# Altium PCB PowerBoard.PcbDoc
Units mil, origin at the board's own origin, x right, y up, seen from the top; angles counter-clockwise.
Board outline 6000 x 6000 mil, 2 copper layers (Top Layer, Bottom Layer); 101 components, 70 nets, 286 pads, 8 vias.
Unrouted connection lines stored in the file: 1.
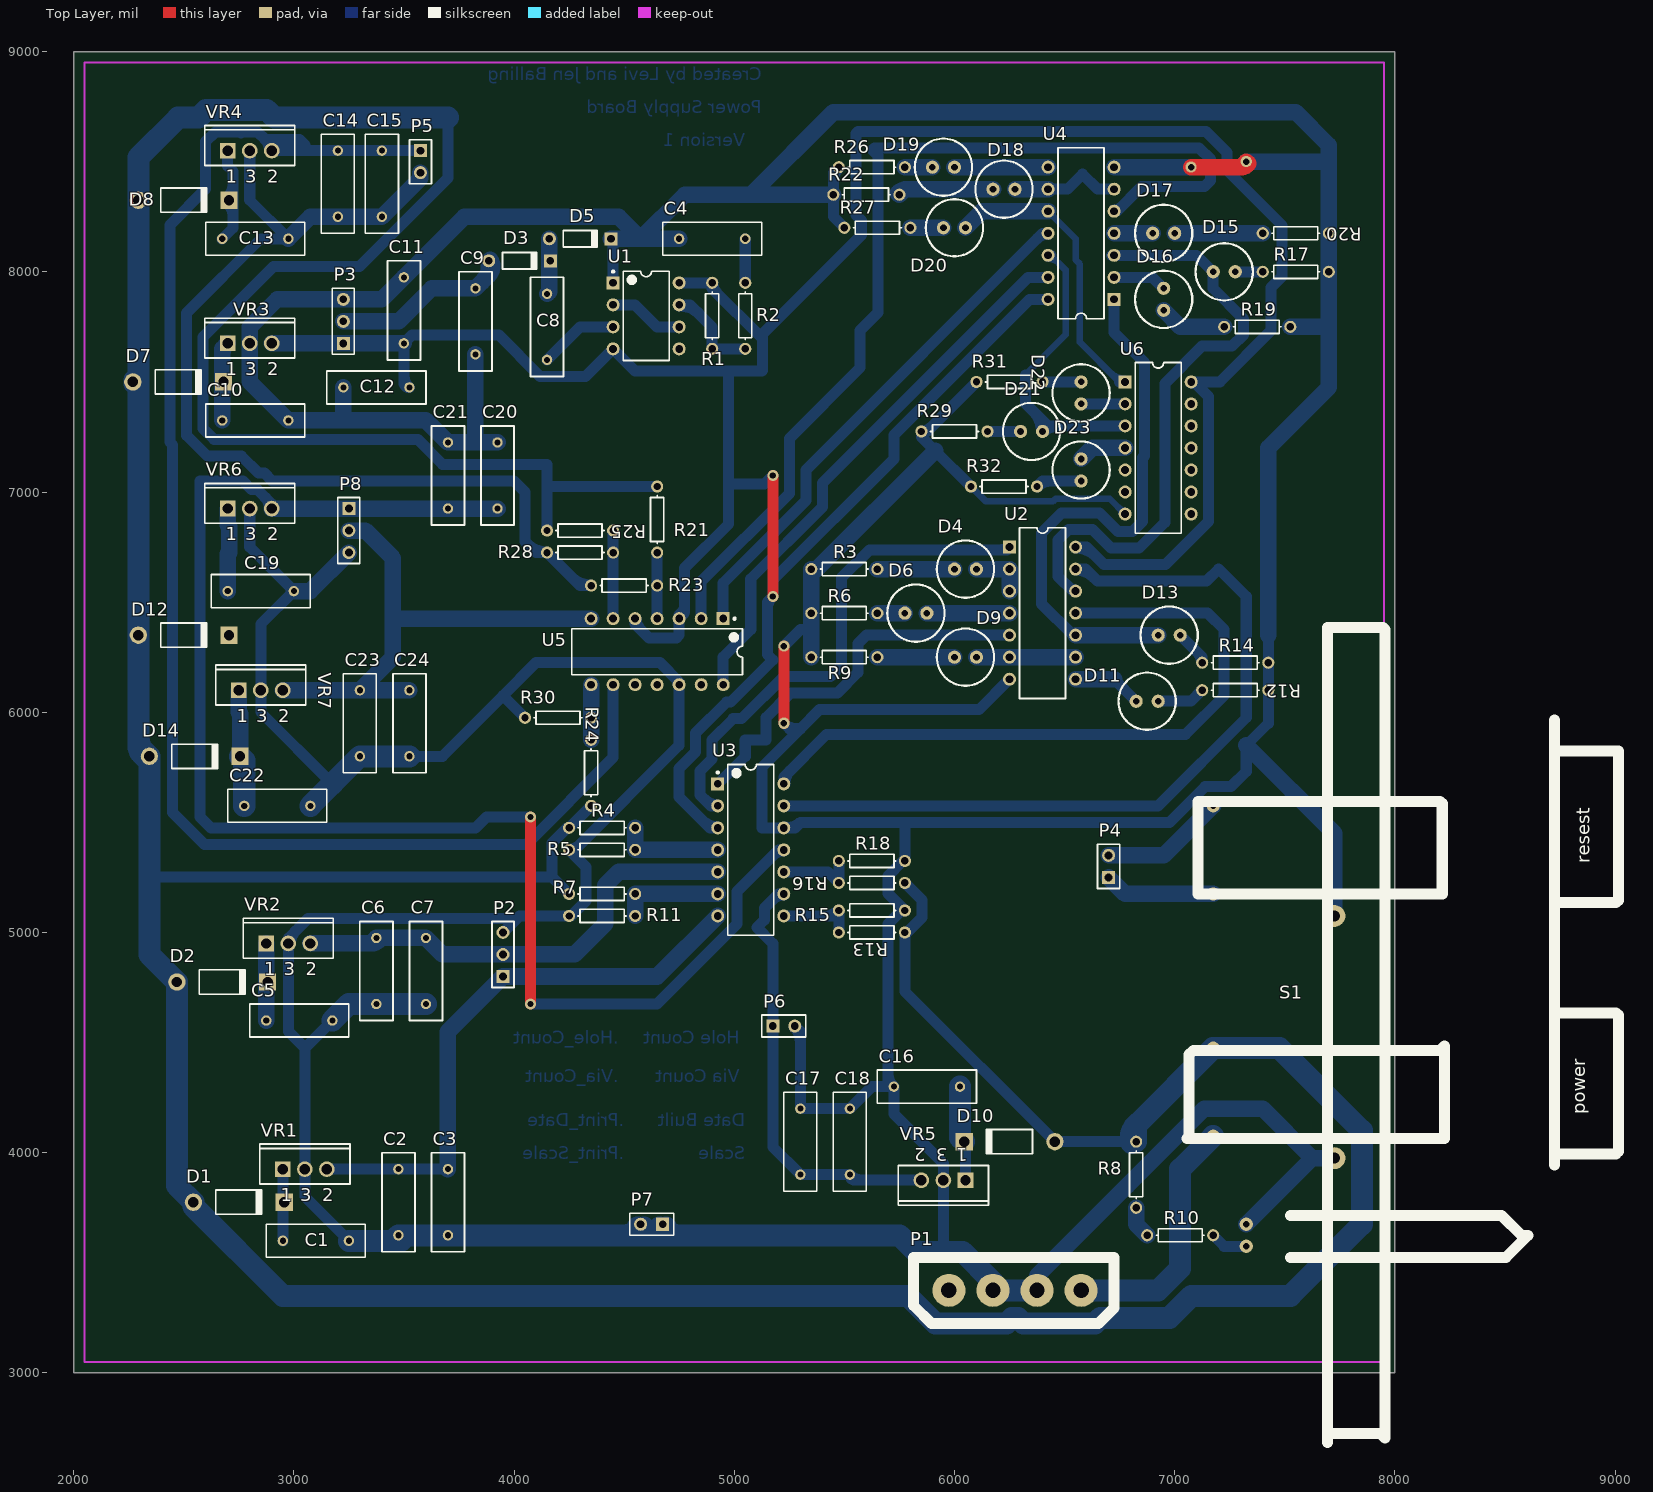
[diagram p0: Top Layer view]
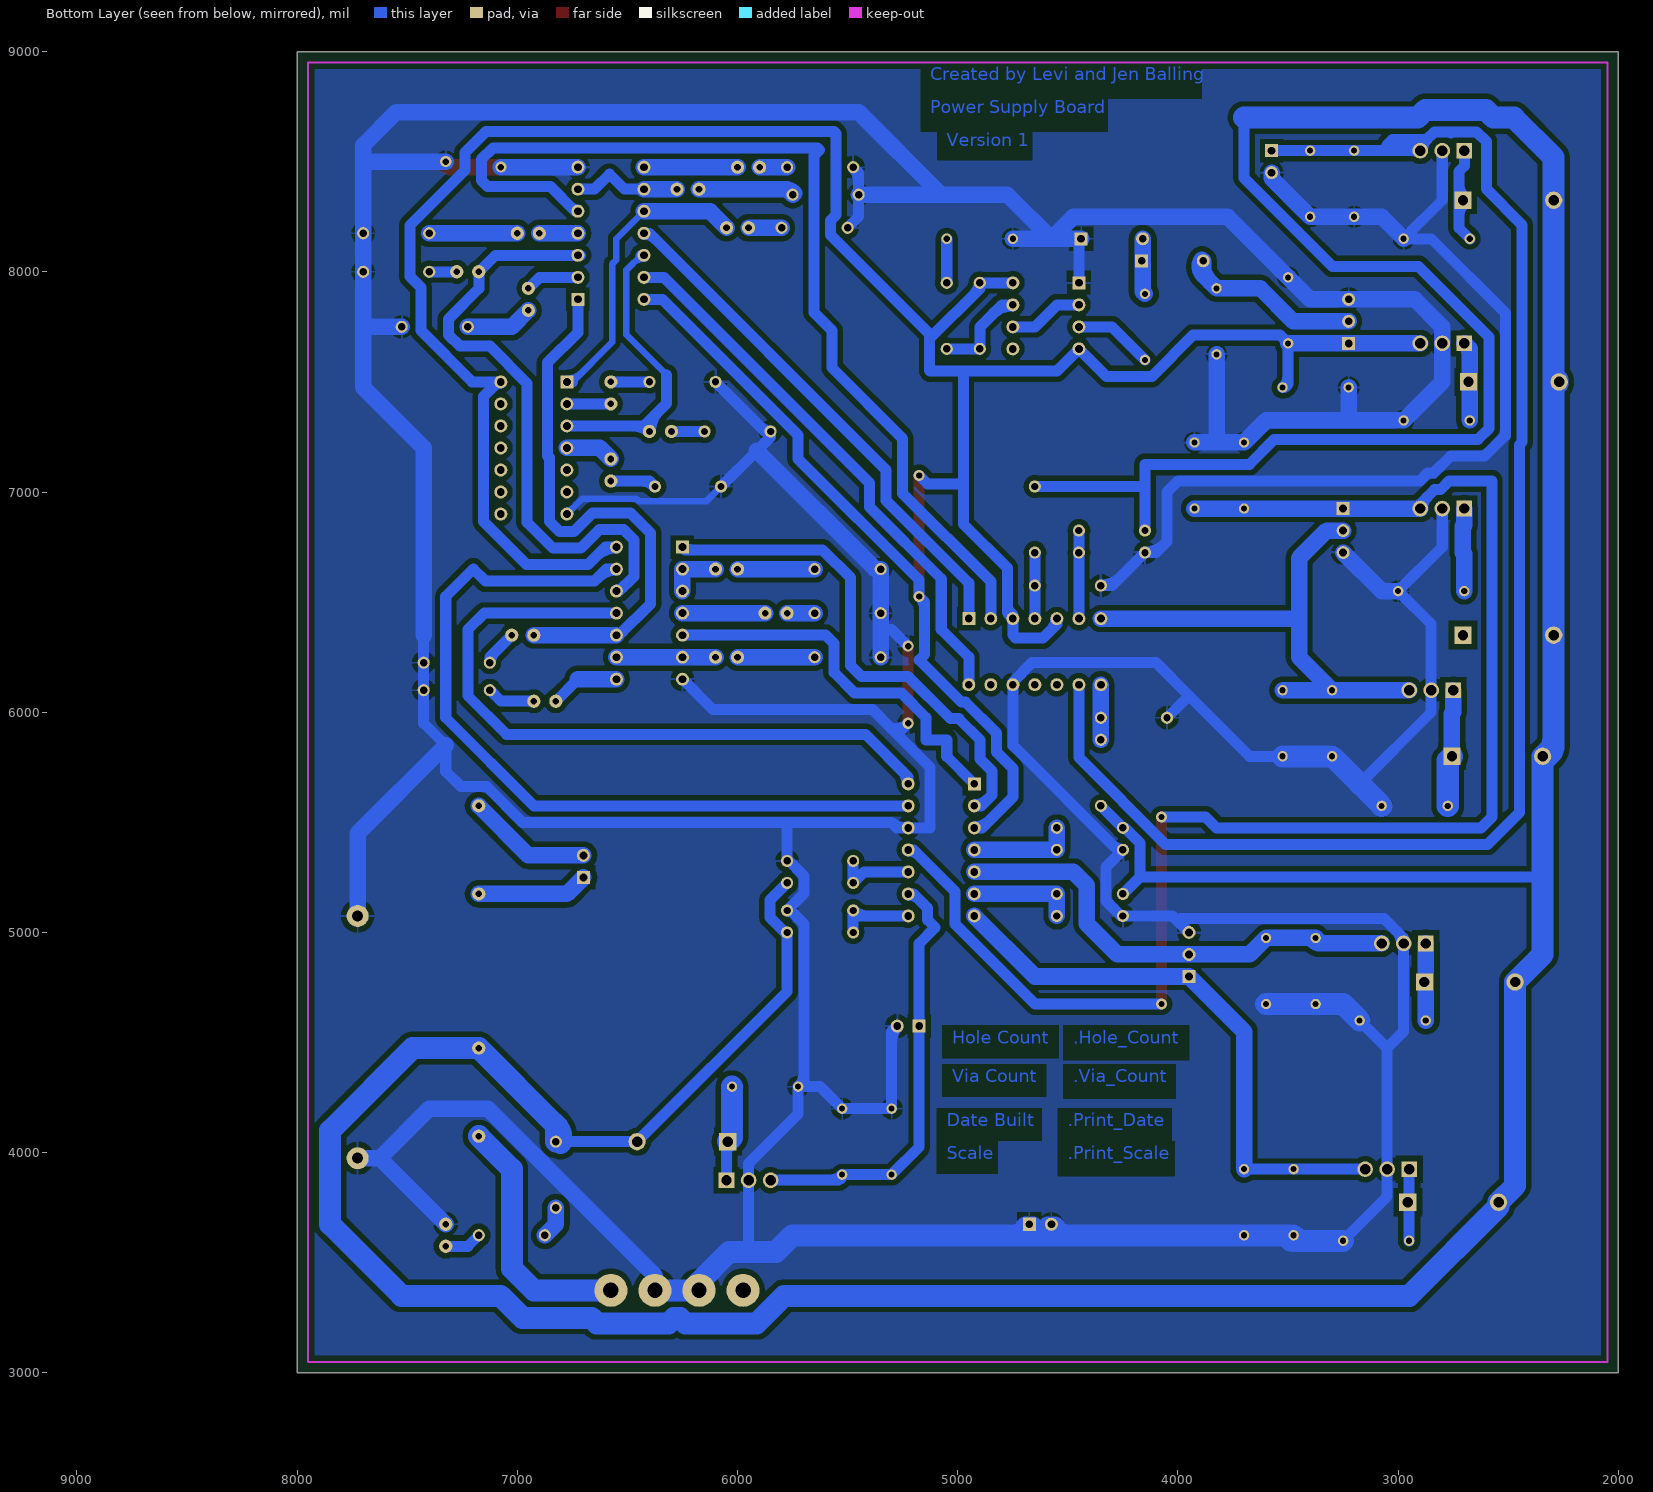
[diagram p1: Bottom Layer view, seen from below]

## Layer stack, top to bottom
Top Layer: signal copper 1.4
Dielectric: dielectric 12.6, FR-4, Dk 4.8
Bottom Layer: signal copper 1.4

## Board outline
2000,3000 8000,3000 8000,9000 2000,9000

## Design rules (kind name [scope] priority, off if disabled: settings)
Clearance [All] p1: gap=25
PolygonConnect [All] p1: connectstyle=Relief reliefconductorwidth=10 reliefentries=4 polygonreliefangle="90 Angle"
RoomDefinition PowerAndFanBoard [InComponentClass('PowerAndFanBoard')] p1: confinementstyle=ConfineIn formatcopy=TRUE lockcomponents=FALSE outline 2050,3050 7950,3050 7950,8950 2050,8950
RoutingVias [All] p1: holewidth=32 width=62 viastyle="Through Hole" minholewidth=28 minwidth=50 maxholewidth=28 maxwidth=50
SilkscreenOverComponentPads [All] p1: minsilkscreentomaskgap=10
SolderMaskExpansion [All] p1: expansion=4
Width [All] p1: maxlimit=100 minlimit=25 preferedwidth=50 minimp=50.000000 maximp=50.000000 favimp=50.000000
27 further rules are at their usual default settings.

## Components (designator, comment, footprint, x,y, rotation, side; value= is the part's Value field where it differs from the comment)
C1 "Cap" RAD-0.3 3100,3600 r180 top
C2 "Cap" RAD-0.3 3475,3775 r90 top
C3 "Cap" RAD-0.3 3700,3775 r90 top
C4 "Cap" RAD-0.3 4900,8150 r180 top
C5 "Cap" RAD-0.3 3025,4600 r180 top
C6 "Cap" RAD-0.3 3375,4825 r90 top
C7 "Cap" RAD-0.3 3600,4825 r90 top
C8 "Cap" RAD-0.3 4150,7750 r90 top
C9 "Cap" RAD-0.3 3825,7775 r270 top
C10 "Cap" RAD-0.3 2825,7325 r180 top
C11 "Cap" RAD-0.3 3500,7825 r270 top
C12 "Cap" RAD-0.3 3375,7475 r0 top
C13 "Cap" RAD-0.3 2825,8150 r180 top
C14 "Cap" RAD-0.3 3200,8400 r90 top
C15 "Cap" RAD-0.3 3400,8400 r90 top
C16 "Cap" RAD-0.3 5875,4300 r0 top
C17 "Cap" RAD-0.3 5300,4050 r270 top
C18 "Cap" RAD-0.3 5525,4050 r270 top
C19 "Cap" RAD-0.3 2850,6550 r180 top
C20 "Cap" RAD-0.3 3925,7075 r270 top
C21 "Cap" RAD-0.3 3700,7075 r270 top
C22 "Cap" RAD-0.3 2925,5575 r180 top
C23 "Cap" RAD-0.3 3300,5950 r90 top
C24 "Cap" RAD-0.3 3525,5950 r90 top
D1 "Diode 1N4001" DO-41 2750,3775 r0 top
D2 "Diode 1N4001" DO-41 2675,4775 r0 top
D3 "Diode 1N4148" DO-35 4025,8050 r0 top
D4 "RED_LED" LED 6100,6650 r180 top
D5 "Diode 1N4148" DO-35 4300,8150 r0 top
D6 "GREEN_LED" LED 5875,6450 r180 top
D7 "Diode 1N4001" DO-41 2475,7500 r0 top
D8 "Diode 1N4001" DO-41 2500,8325 r0 top
D9 "RED_LED" LED 6100,6250 r180 top
D10 "Diode 1N4001" DO-41 6250,4050 r180 top
D11 "GREEN_LED" LED 6825,6050 r0 top
D12 "Diode 1N4001" DO-41 2500,6350 r0 top
D13 "RED_LED" LED 6925,6350 r0 top
D14 "Diode 1N4001" DO-41 2550,5800 r0 top
D15 "RED_LED" LED 7175,8000 r0 top
D16 "GREEN_LED" LED 6950,7925 r270 top
D17 "GREEN_LED" LED 6900,8175 r0 top
D18 "RED_LED" LED 6275,8375 r180 top
D19 "GREEN_LED" LED 6000,8475 r180 top
D20 "RED_LED" LED 6050,8200 r180 top
D21 "RED_LED" LED 6400,7275 r180 top
D22 "GREEN_LED" LED 6575,7400 r90 top
D23 "GREEN_LED" LED 6575,7150 r270 top
P1 "Header 4" MainPowerConnector 5975,3375 r0 top
P2 "Header 3" HDR1X3 3950,4800 r90 top
P3 "Header 3" HDR1X3 3225,7675 r90 top
P4 "Header 2" HDR1X2 6700,5250 r90 top
P5 "Header 2" HDR1X2 3575,8550 r270 top
P6 "Header 2" HDR1X2 5175,4575 r0 top
P7 "Header 2" HDR1X2 4675,3675 r180 top
P8 "Header 3" HDR1X3 3250,6925 r270 top
R1 "Res1" AXIAL-0.3 4900,7800 r270 top
R2 "Res1" AXIAL-0.3 5050,7800 r90 top
R3 "Res1" AXIAL-0.3 5500,6650 r180 top
R4 "Res1" AXIAL-0.3 4400,5475 r0 top
R5 "Res1" AXIAL-0.3 4400,5375 r180 top
R6 "Res1" AXIAL-0.3 5500,6450 r180 top
R7 "Res1" AXIAL-0.3 4400,5175 r0 top
R8 "Res1" AXIAL-0.3 6825,3900 r270 top
R9 "Res1" AXIAL-0.3 5500,6250 r180 top
R10 "Res1" AXIAL-0.3 7025,3625 r0 top
R11 "Res1" AXIAL-0.3 4400,5075 r180 top
R12 "Res1" AXIAL-0.3 7275,6100 r0 top
R13 "Res1" AXIAL-0.3 5625,5000 r180 top
R14 "Res1" AXIAL-0.3 7275,6225 r0 top
R15 "Res1" AXIAL-0.3 5625,5100 r0 top
R16 "Res1" AXIAL-0.3 5625,5225 r180 top
R17 "Res1" AXIAL-0.3 7550,8000 r0 top
R18 "Res1" AXIAL-0.3 5625,5325 r0 top
R19 "Res1" AXIAL-0.3 7375,7750 r0 top
R20 "Res1" AXIAL-0.3 7550,8175 r0 top
R21 "Res1" AXIAL-0.3 4650,6875 r270 top
R22 "Res1" AXIAL-0.3 5600,8350 r180 top
R23 "Res1" AXIAL-0.3 4500,6575 r180 top
R24 "Res1" AXIAL-0.3 4350,5725 r90 top
R25 "Res1" AXIAL-0.3 4300,6825 r0 top
R26 "Res1" AXIAL-0.3 5625,8475 r180 top
R27 "Res1" AXIAL-0.3 5650,8200 r180 top
R28 "Res1" AXIAL-0.3 4300,6725 r180 top
R29 "Res1" AXIAL-0.3 6000,7275 r180 top
R30 "Res1" AXIAL-0.3 4200,5975 r180 top
R31 "Res1" AXIAL-0.3 6250,7500 r180 top
R32 "Res1" AXIAL-0.3 6225,7025 r180 top
S1 "nintendo_power_reset" PCBComponent_1 7175,4075 r90 top
U1 "LM555CN" N08E 4600,7800 r0 top
U2 "SN7416N" N014 6400,6450 r270 top
U3 "LM339N" N14A 5075,5375 r0 top
U4 "SN7416N" N014 6575,8175 r90 top
U5 "LM339N" N14A 4650,6275 r270 top
U6 "SN7416N" N014 6925,7200 r270 top
VR1 "L7812CP" ISOWATT220AB 3050,3925 r0 top
VR2 "L7805CP" ISOWATT220AB 2975,4950 r0 top
VR3 "L7805CP" ISOWATT220AB 2800,7675 r0 top
VR4 "L7812CP" ISOWATT220AB 2800,8550 r0 top
VR5 "L7805CP" ISOWATT220AB 5950,3875 r180 top
VR6 "L7812CP" ISOWATT220AB 2800,6925 r0 top
VR7 "L7805CP" ISOWATT220AB 2850,6100 r0 top

## Footprints (in the part's own frame and the unit in brackets; to place one, negate y for a bottom-side part, rotate by r counter-clockwise, add the part's x,y. Pads: shape width x height; smd on the part's side, far side on the other; paste and mask are expansions set on the pad)
AXIAL-0.3 [mm] "Axial Device, Thru-Hole; 2 Leads; 0.3 in Pin Spacing"
  round 1.4 hole 0.85: 1(-3.81,0) 2(3.81,0)
  silkscreen extent -2.77,-0.76 2.77,0.76
DO-35 [mm] "Diode, Axial; Body 3.8 x 1.9 mm (LxDia. max), Lead Dia. 0.53 mm (max)"
  round 1.5 hole 0.9: 1(-3.55,0)
  rect 1.5x1.5 hole 0.9: 2(3.55,0)
  silkscreen extent -1.95,-0.95 2.05,0.95
DO-41 [mm] "Diode, Axial; Body 5.2 x 2.7 mm (LxDia. max), Lead Dia. 0.86 mm (max)"
  round 2 hole 1.2: 1(-5.23,0)
  rect 2x2 hole 1.2: 2(5.23,0)
  silkscreen extent -2.65,-1.4 2.75,1.4
HDR1X2 [mm] "Connector; Header; 2 Position"
  rect 1.5x1.5 hole 0.9: 1(0,0)
  round 1.5 hole 0.9: 2(2.54,0)
  silkscreen extent -1.27,-1.27 3.81,1.27
HDR1X3 [mm] "Connector; Header; 3 Position"
  rect 1.5x1.5 hole 0.9: 1(0,0)
  round 1.5 hole 0.9: 2(2.54,0) 3(5.08,0)
  silkscreen extent -1.27,-1.27 6.35,1.27
ISOWATT220AB [mm] "TO, Thru-Hole, Vertical, Heatsink Mounted; 3 In-Line Leads; Pitch 2.54 mm; Pin sequence 1, 3, 2"
  rect 1.8x1.8 hole 1.2: 1(-2.54,0)
  round 1.8 hole 1.2: 2(2.54,0) 3(0,0)
  silkscreen extent -5.2,-1.7 5.2,2.9
LED [mil] "standard 5mm LED"
  round 60 hole 30: 1(0,0) 2(100,0)
  silkscreen extent -80,-130 180,130
MainPowerConnector [mil]
  round 150 hole 70: 1(0,0) 2(200,0) 3(400,0) 4(600,0)
  silkscreen extent -160,-150 750,150
N08E [mm] "DIP, 8-Leads, Row Spacing 7.62mm, Pitch 2.54mm, Body 9.91x6.35mm"
  rect 1.5x1.5 hole 0.9: 1(-3.81,3.81)
  round 1.5 hole 0.9: 2(-3.81,1.27) 3(-3.81,-1.27) 4(-3.81,-3.81) 5(3.81,-3.81) 6(3.81,-1.27) 7(3.81,1.27) 8(3.81,3.81)
  silkscreen extent -3.93,-5.15 2.65,5.23, body extent -3.6,-5.15 3.6,5.15, height 5.34
N014 [mm] "DIP; 14 Leads; Row Spacing 7.62 mm; Pitch 2.54 mm"
  rect 1.5x1.5 hole 0.9: 1(-7.62,-3.81)
  round 1.5 hole 0.9: 2(-5.08,-3.81) 3(-2.54,-3.81) 4(0,-3.81) 5(2.54,-3.81) 6(5.08,-3.81) 7(7.62,-3.81) 8(7.62,3.81) 9(5.08,3.81) 10(2.54,3.81) 11(0,3.81) 12(-2.54,3.81) 13(-5.08,3.81) 14(-7.62,3.81)
  silkscreen extent -9.85,-2.65 9.85,2.65
N14A [mm] "DIP, 14-Leads, Row Spacing 7.62mm, Pitch 2.54mm, Body 19.56x6.35mm"
  rect 1.5x1.5 hole 0.9: 1(-3.81,7.62)
  round 1.5 hole 0.9: 2(-3.81,5.08) 3(-3.81,2.54) 4(-3.81,0) 5(-3.81,-2.54) 6(-3.81,-5.08) 7(-3.81,-7.62) 8(3.81,-7.62) 9(3.81,-5.08) 10(3.81,-2.54) 11(3.81,0) 12(3.81,2.54) 13(3.81,5.08) 14(3.81,7.62)
  silkscreen extent -3.93,-9.85 2.65,9.85, body extent -3.55,-9.85 3.55,9.85, height 5.08
PCBComponent_1 [mil]
  round 60 hole 30: 1(0,0) 2(400,0) 3(1100,0) 4(1500,0) 5(-500,-150) 6(-400,-150)
  round 100 hole 50: 7(-100,-550) 8(1000,-550)
  silkscreen extent -1390,-1840 2310,120
RAD-0.3 [mm] "Radial Cap, Thru-Hole; 2 Leads; 0.3 in Pin Spacing"
  round 1.2 hole 0.7: 1(-3.81,0) 2(3.81,0)
  silkscreen extent -5.71,-1.91 5.71,1.91

## Part data
C1 C2 C3 C4 C5 C6 C7 C8 C9 C10 C11 C12 C13 C14 C15 C16 C17 C18 C19 C20 C21 C22 C23 C24: "Capacitor"
D1 D2 D7 D8 D10 D12 D14: "1 Amp General Purpose Rectifier"
D3 D5: "High Conductance Fast Diode"
D4 D6 D9 D11 D13 D15 D16 D17 D18 D19 D20 D21 D22 D23: library part LED0, "Typical INFRARED GaAs LED"
P1: "Header, 4-Pin"
P2 P3 P8: "Header, 3-Pin"
P4 P5 P6 P7: "Header, 2-Pin"
R1 R2 R3 R4 R5 R6 R7 R8 R9 R10 R11 R12 R13 R14 R15 R16 R17 R18 R19 R20 R21 R22 R23 R24 R25 R26 R27 R28 R29 R30 R31 R32: "Resistor"
U1: "Timer"
U2 U4 U6: "Hex Inverter Buffer / Driver with High-Voltage Outputs"
U3 U5: "Low Power Low Offset Voltage Quad Comparator"
VR1 VR4 VR6: library part L7805CP, "Positive Voltage Regulator"
VR2 VR3 VR5 VR7: "Positive Voltage Regulator"

## Via types
v1: diameter 50, hole 28, Top Layer to Bottom Layer, 8 vias

## Nets (pads, with @x,y where several pads share a name; then routed paths per layer and width w, separated by ;. In a path a pad name is that pad's centre, name@x,y a point inside that pad or via, vN(x,y) a via of type N, cw(c..) or ccw(c..) an arc to the next point about the centre after c; other vN are vias at no path point)
+24V: D1.1 D2.1 D7.1 D8.1 D10.1 D12.1 D14.1 R4.1 R7.1 R8.1 R13.1 R16.1 R21.1 R24.1 R25.1 S1.2 | length 23177.1
  Bottom Layer w50: 2346.65,5252.56 4172.44,5252.56 ; 3700,8700 3700,8426.26 3298.74,8025 2908.42,8025 2587.5,7704.08 2587.5,7288.76 2638.76,7237.5 3563.76,7237.5 3676.26,7125 4150,7125 4150,7025 ; R25.1 4150,7025 ; R7.1 4172.44,5252.56 ; R24.1 R4.1 4240.31,5475 4172.44,5407.13 4172.44,5252.56 ; R21.1 4150,7025 ; R16.1 5852.56,5147.44 5852.56,5067.87 5784.69,5000 R13.1 5775,4730.91 D10.1 R8.1
  Bottom Layer w100: D7.1@2276.61,7492.48 ccw(c2234.4,7534.69) 2294.09,7534.69 ; D7.1@2276.61,7507.52 cw(c2234.4,7465.31) 2294.09,7465.31 ; 2294.09,5895.05 ccw(c2439.14,5895.05) D14.1@2336.58,5792.48 ; D14.1@2341.6,5789.67 cw(c2356.16,5850) 2294.09,5850 ; 3700,8700 2912.24,8700 2876.81,8735.43 2602.44,8735.43 2567,8700 2475,8700 2294.09,8519.09 D8.1 2294.09,5850 ; R8.1@6802.56,4050 cw(c6929.45,4050) 6839.72,4139.72 ; R8.1@6803.32,4044.21 cw(c6884.18,4065.81) 6825,4125 ; R8.1 6825,4125 ; 2294.09,5850 D14.1 2344.09,4900 D2.1 2469.09,3850 D1.1 2544.09,3755.91 2950,3350 5787.87,3350 5912.87,3225 6237.13,3225 6262.13,3250 6287.87,3250 6312.87,3225 6637.13,3225 6662.13,3250 6976.78,3250 7076.78,3350 7525,3350 7850,3675 7850,4100 7475,4475 S1.2 6825,4125
+24V_IN: P1.4 S1.1 | length 1153.6
  Bottom Layer w100: P1.4 6925,3375 7025,3475 7025,3925 S1.1
DAMPVCC5: C6.2 C7.2 P2.2 U3.5 VR2.2 | length 2229.8
  Bottom Layer w75: VR2.2 3350,4950 ; 3348.15,4950 ccw(c3348.15,5001.85) C6.2@3384.81,4965.19 ; C6.2@3385.31,4965.71 cw(c3350,4997.53) 3350,4950 ; U3.5 4475,5275 4415.06,5215.06 4415.06,5040.06 4275,4900 P2.2 3675,4900 C7.2 C6.2 3350,4950
DAMPVCC12: C2.2 C3.2 P2.1 U3.7 VR1.2 | length 2617.5
  Bottom Layer w50: VR1.2 C3.2
  Bottom Layer w75: C3.2 3700,4550 P2.1 4650,4800 U3.7
GHVAC_VCC12: C14.2 C15.2 P5.1 U5.9 VR4.2 | length 6984.4
  Bottom Layer w50: 2867.47,8603.35 cw(c2814.11,8550) VR4.2@2889.57,8550 ; VR4.2@2889.59,8550.62 ccw(c2825.25,8554.43) 2870.82,8600 ; VR4.2 3050,8550 ; P5.1 C15.2 C14.2 3050,8550 ; U5.9 4450,5793.93 4056.07,5400 2593.93,5400 2450,5543.93 2450,7214.12 2437.5,7226.62 2437.5,8212.5 2600,8375 2600,8591.58 2643.86,8635.43 2756.14,8635.43 2760.38,8631.2 2764.61,8635.43 2835.39,8635.43 2870.82,8600 ; 2870.82,8600 3025,8600 3050,8575 3050,8550
GND: C1.1 C2.1 C3.1 C4.2 C5.1 C6.1 C7.1 C9.2 C10.1 C11.1 C12.1 C13.1 C14.1 C15.1 C16.1 C17.1 C18.1 C19.1 C20.1 C21.1 C22.1 C23.1 C24.1 D5.2 P1.2 P1.3 P2.3 P3.3 P5.2 P6.2 P7.1 P7.2 P8.3 R3.2 R5.2 R6.2 R9.2 R11.2 R12.2 R14.2 R15.2 R17.2 R18.2 R19.2 R20.2 R22.2 R23.2 R26.2 R27.2 R28.2 R29.2 R30.2 R31.2 R32.2 S1.6 S1.7 S1.8 U1.1 U2.7 U3.12 U4.7 U5.12 U6.7 VR1.3 VR2.3 VR3.3 VR4.3 VR5.3 VR6.3 VR7.3 | length 44384.2
  Top Layer w50: v1(5225,5950) v1(5225,6300)
  Top Layer w75: v1(7075,8475) 7300,8475 ; 7294.82,8475 ccw(c7294.82,8530.18) v1@7333.84,8491.16 ; v1(7325,8500) 7300,8475 ; v1@7335,8492.5 cw(c7300,8518.75) 7300,8475
  Bottom Layer w30: R32.2@6075,7012.44 cw(c6075,6982.12) 6096.44,7003.56 cw(c6117.88,7025) R32.2@6087.56,7025 ; R32.2 6142.56,6957.44 6446.98,6957.44 6459.07,6969.53 6705.47,6969.53 U6.7 ; U6.7@6760.47,6900 ccw(c6725.4,6900) 6750.2,6924.8 ccw(c6775,6949.6) U6.7@6775,6914.53
  Bottom Layer w50: VR6.3 2800,6750 C19.1 2850,6400 VR7.3 2850,6000 3175,5675 ; VR4.3 2800,8325 C13.1 2850,8150 2512.5,7812.5 2512.5,7257.69 2607.69,7162.5 2762.5,7162.5 2839.57,7085.43 2866.45,7085.43 2901.89,7050 4000,7050 4050,7000 4050,6775 4100,6725 R28.2 4300,6575 R23.2 ; VR2.3@2985.43,4950 cw(c3067.94,4950) 3009.6,5008.34 ; C5.1 3050,4475 ; C1.1 3050,3800 VR1.3 3050,4475 ; C24.1 3675,5800 3950,6075 ; P2.3 4000,5050 ; R30.2 3950,6075 ; 4060.28,6764.72 ccw(c4150,6854.45) R28.2@4150,6727.56 ; R5.2@4250,5377.56 ccw(c4250,5444.09) 4297.05,5397.05 ; 4260.28,6614.72 ccw(c4350,6704.45) R23.2@4350,6577.56 ; D5.2@4436.56,8146.8 cw(c4404.12,8114.36) 4450,8114.36 ; D5.2 4450,8139.76 U1.1 ; 4733.45,6154.01 cw(c4704.44,6125) U5.12@4745.47,6125 ; v1(5225,6300) 5300,6375 5350,6375 ; U3.12@5226.08,5479.4 ccw(c5244.78,5555.22) 5300,5500 ; P6.2@5271.8,4571.8 cw(c5203.71,4503.71) 5300,4503.71 ; P6.2 5300,4550 C17.1 C18.1 5625,4300 C16.1 ; 5285.36,5925 cw(c5285.36,6010.36) v1(5225,5950) 5250,5925 5300,5925 ; 5450,8408.47 cw(c5541.53,8408.47) R26.2@5476.81,8473.19 ; R26.2 5450,8450 R22.2 5450,8250 R27.2 ; 5697.44,4363.21 ccw(c5788.21,4363.21) C16.1@5724.03,4299.03 ; C16.1@5724.93,4298.62 cw(c5726.41,4327.56) 5697.44,4327.56 ; 5743.74,5084.49 cw(c5775,5053.24) R15.2@5775,5097.44 ; R29.2@5850,7277.56 ccw(c5850,7344.09) 5897.05,7297.05 ; R29.2@5852.56,7275 ccw(c5919.09,7275) 5872.05,7227.95 ; 5950,3550 VR5.3 5950,3950 5725,4175 C16.1 ; R32.2 5912.5,7187.5 5850,7250 R29.2 5875,7275 R31.2 ; U2.7 6112.5,6012.5 5387.5,6012.5 5300,5925 ; 7425,6350 R14.2 R12.2 7425,5950 7325,5850 7325,5731.43 7256.07,5662.5 7138.76,5662.5 6976.26,5500 5775,5500 ; 3050,4475 2975,4550 VR2.3 2975,4973.74 3063.76,5062.5 3987.5,5062.5 4000,5050 ; 3950,6075 4100,6225 4662.47,6225 4750,6137.47 U5.12 4750,5850 4275,5375 R5.2 4327.56,5297.44 4327.56,5142.87 4259.69,5075 R11.2 4025,5075 4000,5050 ; 5300,5500 5775,5500 ; 5300,5500 5275,5475 U3.12 5125,5475 5125,5750 5300,5925 ; 5697.44,4327.56 C16.1 ; 5697.44,4327.56 5697.44,5038.19 5759.25,5100 R15.2 5697.44,5177.56 5697.44,5257.13 5765.31,5325 R18.2 5775,5500
  Bottom Layer w75: C13.1 3075,8250 C14.1 C15.1 3575,8425 P5.2 ; C19.1 3075,6550 P8.3 ; C12.1 3225,7325 ; C9.2 3825,7225 ; C20.1 3825,7225 ; D5.2 4575,8150 ; C4.2 4575,8150 ; R9.2 5350,6375 R6.2 R3.2 5375,6650 5912.5,7187.5 ; R22.2 5075,8350 ; P1.3 6375,3441.42 6783.58,3850 6784.1,3850 7134.1,4200 7400,4200 7625,3975 ; U4.7 v1(7075,8475) ; S1.6 7625,3975 ; 7325,5850 7725,5450 S1.8 ; v1(7325,8500) 7675,8500 ; 7425,6350 7425,7200 7700,7475 7700,7750 ; R19.2 7700,7750 ; S1.7 7625,3975 ; 3225,7325 3600,7325 C21.1 3825,7225 ; 3225,7325 C10.1 2800,7500 VR3.3 2800,7750 2925,7875 P3.3 3400,7875 C11.1 3775,8250 4475,8250 4575,8150 ; 4575,8150 4775,8350 5075,8350 ; 5075,8350 5450,8725 7550,8725 7700,8575 R20.2 R17.2 7700,7750
  Bottom Layer w100: C22.1 3175,5675 C23.1 C24.1 ; C5.1 3250,4675 C6.1 C7.1 ; C1.1 3450,3600 C2.1 C3.1 5750,3625 5825,3550 5950,3550 6037.13,3550 6175,3412.13 P1.2 P1.3 ; 4503.71,3625 ccw(c4503.71,3746.29) P7.2@4589.48,3660.52 ; P7.2@4560.52,3660.52 ccw(c4646.29,3746.29) 4646.29,3625 ; 4603.71,3625 ccw(c4603.71,3746.29) P7.1@4689.48,3660.52 ; P7.1@4660.52,3660.52 ccw(c4746.29,3746.29) 4746.29,3625 ; 3478.33,3600 ccw(c3478.33,3621.67) 3493.65,3606.35 cw(c3478.33,3621.67) 3478.33,3600
MICVCC+5: C11.2 C12.2 P3.1 R1.1 U1.4 U1.8 U2.14 U3.3 U4.14 U5.3 U5.5 U6.14 VR3.2 | length 15120.6
  Top Layer w50: v1(5175,6525) v1(5175,7075)
  Bottom Layer w50: 3500,7532.03 ccw(c3582.03,7532.03) C12.2@3524.03,7474.03 ; C12.2@3524.92,7473.62 cw(c3526.42,7500) 3500,7500 ; C12.2 3500,7500 ; U5.5 4550,6401.26 4613.76,6337.5 4737.5,6337.5 4750,6350 U5.3 4750,6442 4775,6467 ; U5.5@4554.53,6425 ccw(c4622.78,6425) 4574.52,6376.74 ; U5.3@4746.8,6428.2 ccw(c4678.71,6496.29) 4775,6496.29 ; U5.3@4748.47,6429.26 ccw(c4734.9,6467) 4775,6467 ; U1.8 R1.1 4900,7925 5127.56,7697.44 ; U5.3@4754.53,6425 cw(c4806.49,6425) 4769.75,6461.74 ; 4856.1,5508.07 ccw(c4925,5576.96) U3.3@4925,5479.53 ; R1.1@4902.56,7950 ccw(c4969.09,7950) 4922.05,7902.95 ; U3.3 4889.17,5475 4750,5614.17 4750,5743.93 4825,5818.93 4825,5906.07 4964.41,6045.47 4982.94,6045.47 5175,6237.53 5150,6262.53 5150,6500 v1(5175,6525) ; 4987.5,7037.5 5137.5,7037.5 v1(5175,7075) ; 5150,6464.64 cw(c5235.36,6464.64) v1(5175,6525) ; U4.14 6340.31,7875 5725,7259.69 5725,7150 5175,6600 v1(5175,6525) ; U2.14@6550,6745.47 cw(c6550,6612.87) 6643.77,6706.63 ; U2.14 6600.4,6750 6679.93,6670.47 6957.94,6670.47 7154.53,6867.06 7154.53,7432.94 U6.14@7087.47,7500 ; U6.14@7075,7495.47 cw(c7075,7454.44) 7104.01,7483.45 ; U6.14 U6.14@7087.47,7500 ; 3500,7500 C11.2 3537.5,7712.5 3931.43,7712.5 4118.93,7525 4325,7525 U1.4 4550,7550 4975,7550 ; 4775,6467 4775,6654.38 4975,6854.38 4975,7550 ; 4975,7550 5125,7550 5127.56,7552.56 5127.56,7697.44 ; 5127.56,7697.44 5127.56,7717.87 5577.56,8167.87 5577.56,8232.13 5552.56,8257.13 5552.56,8627.56 5562.5,8637.5 7142.31,8637.5 7237.5,8542.31 7237.5,8461.24 7487.5,8211.24 7487.5,7977.81 7437.5,7927.81 7437.5,7732.69 7204.81,7500 U6.14@7087.47,7500
  Bottom Layer w75: VR3.2 C11.2
NetC1_2: C1.2 D1.2 VR1.1 | length 411.2
  Bottom Layer w50: C1.2 VR1.1 ; 2950,3726.05 cw(c3004.86,3726.05) D1.2@2966.07,3764.84 ; 2950,3823.95 ccw(c3004.86,3823.95) D1.2@2966.07,3785.16
NetC4_1: C4.1 R2.2 | length 200
  Bottom Layer w50: R2.2 C4.1
NetC5_2: C5.2 D2.2 VR2.1 | length 350
  Bottom Layer w75: C5.2 VR2.1
NetC8_1: C8.1 U1.3 | length 362.1
  Bottom Layer w50: C8.1 4300,7750 U1.3
NetC8_2: C8.2 D3.2 D5.1 | length 254.2
  Bottom Layer w75: C8.2 4160.24,7910.24 D5.1
NetC10_2: C10.2 D7.2 VR3.1 | length 423.5
  Bottom Layer w75: C10.2 2675,7650 VR3.1 ; 2675,7619.63 cw(c2755.37,7619.63) VR3.1@2698.54,7676.46
NetC13_2: C13.2 D8.2 VR4.1 | length 588
  Bottom Layer w50: C13.2 2725,8200 2725,8456.07 2700,8481.07 VR4.1 ; D8.2@2695.74,8314.84 cw(c2625.11,8244.21) 2725,8244.21 ; D8.2@2695.74,8335.16 ccw(c2625.11,8405.79) 2725,8405.79
NetC16_2: C16.2 D10.2 VR5.1 | length 478.4
  Bottom Layer w50: D10.2@6033.93,4039.84 cw(c5995.15,4001.05) 6050,4001.05 ; D10.2 6050,4044.09 VR5.1
  Bottom Layer w100: C16.2 6025,4069.09 D10.2
NetC19_2: C19.2 D12.2 VR6.1 | length 379.9
  Bottom Layer w75: C19.2 2700,6719.09 2705.91,6725 2705.91,6844.09 2700,6850 VR6.1
NetC22_2: C22.2 D14.2 VR7.1 | length 535.4
  Bottom Layer w75: VR7.1 2750,6000 2755.91,5994.09 D14.2
  Bottom Layer w100: D14.2 2775,5780.91 C22.2
NetD4_1: D4.1 U2.2 U2.3 | length 250
  Bottom Layer w75: D4.1 U2.2 U2.3
NetD4_2: D4.2 R3.1 | length 350
  Bottom Layer w75: R3.1 D4.2
NetD6_1: D6.1 U2.4 | length 375
  Bottom Layer w75: D6.1 U2.4
NetD6_2: D6.2 R6.1 | length 125
  Bottom Layer w75: R6.1 D6.2
NetD9_1: D9.1 U2.6 U2.9 | length 450
  Bottom Layer w75: D9.1 U2.6 U2.9
NetD9_2: D9.2 R9.1 | length 350
  Bottom Layer w75: R9.1 D9.2
NetD11_1: D11.1 U2.8 | length 316.4
  Bottom Layer w50: 6725,6150 D11.1
  Bottom Layer w75: U2.8 6725,6150
NetD11_2: D11.2 R12.1 | length 220.7
  Bottom Layer w50: D11.2 7075,6050 R12.1
NetD13_1: D13.1 U2.10 U4.1 | length 2561.4
  Bottom Layer w50: 6520.99,6366.55 ccw(c6550,6395.56) U2.10@6550,6354.53 ; U2.10 6537.53,6350 6395.47,6492.06 6395.47,6814.01 6485.99,6904.53 6658,6904.53 6742.06,6820.47 6807.94,6820.47 6854.53,6867.06 6854.53,7155.78 6862.5,7163.76 6862.5,7587.5 6725,7725 U4.1
  Bottom Layer w75: U2.10 D13.1
NetD13_2: D13.2 R14.1 | length 218.7
  Bottom Layer w50: D13.2 7125,6250 R14.1 ; 7102.95,6272.05 cw(c7055.91,6225) R14.1@7122.44,6225
NetD15_1: D15.1 U2.12 U4.3 | length 2809
  Bottom Layer w50: 6520.99,6566.55 ccw(c6550,6595.56) U2.12@6550,6554.53 ; U2.12 6537.53,6550 6470.47,6617.06 6470.47,6782.94 6517.06,6829.53 6626.94,6829.53 6710.99,6745.47 6839.01,6745.47 6956.27,6862.73 6956.27,7493.73 7125.03,7662.5 7261.24,7662.5 7312.5,7713.76 7312.5,7786.24 7175,7923.74 D15.1 7100,8075 U4.3 U4.3@6712.53,8075
NetD15_2: D15.2 R17.1 | length 125
  Bottom Layer w50: D15.2 R17.1
NetD16_1: D16.1 U4.2 | length 245.7
  Bottom Layer w50: U4.2 6900,7975 D16.1
NetD16_2: D16.2 R19.1 | length 306.1
  Bottom Layer w75: D16.2 7025,7750 R19.1
NetD17_1: D17.1 U4.4 | length 175
  Bottom Layer w75: U4.4 D17.1
NetD17_2: D17.2 R20.1 | length 400
  Bottom Layer w75: D17.2 R20.1
NetD18_1: D18.1 U4.6 U4.9 | length 506.3
  Bottom Layer w50: U4.9 6514.41,8375 6582.4,8443 6650.4,8375 U4.6
  Bottom Layer w75: D18.1 U4.9
NetD18_2: D18.2 R22.1 | length 483.5
  Bottom Layer w75: R22.1@5742.97,8357.03 cw(c5786.36,8313.64) 5786.36,8375 ; R22.1 5775,8375 D18.2
NetD19_1: D19.1 U4.8 | length 425
  Bottom Layer w75: D19.1 U4.8
NetD19_2: D19.2 R26.1 | length 125
  Bottom Layer w75: R26.1 D19.2
NetD20_1: D20.1 U4.10 U6.1 | length 1470.7
  Bottom Layer w30: U4.10@6425,8260.47 cw(c6425,8225.4) 6449.8,8250.2 cw(c6474.6,8275) U4.10@6439.53,8275 ; U4.10 6550,8150 6550,8054.39 6569.53,8034.87 6569.53,7680.47 U6.1@6750,7500 ; 6707.52,7542.48 ccw(c6775,7609.96) U6.1@6775,7514.53
  Bottom Layer w50: U6.1@6750,7500 U6.1
  Bottom Layer w75: D20.1 6125,8275 U4.10
NetD20_2: D20.2 R27.1 | length 150
  Bottom Layer w75: R27.1 D20.2
NetD21_1: D21.1 U4.12 U6.3 | length 1515.1
  Bottom Layer w30: 6322.44,7532.13 6504.53,7714.21 6504.53,8007.94 U4.12@6437.47,8075 ; U4.12@6425,8060.47 cw(c6425,7995.3) 6471.09,8041.38
  Bottom Layer w50: 6322.44,7532.13 6322.44,7402.56 6425,7300 U6.3 ; 6356.11,7368.89 cw(c6262.22,7275) D21.1@6395,7275 ; D21.1@6403.54,7271.46 cw(c6472.43,7202.57) 6472.43,7300 ; U4.12 U4.12@6437.47,8075
NetD21_2: D21.2 R29.1 | length 150
  Bottom Layer w50: R29.1 D21.2
NetD22_1: D22.1 U6.2 | length 200
  Bottom Layer w50: D22.1 U6.2
NetD22_2: D22.2 R31.1 | length 175
  Bottom Layer w50: R31.1 D22.2
NetD23_1: D23.1 U6.4 | length 220.7
  Bottom Layer w75: D23.1 6625,7200 U6.4
NetD23_2: D23.2 R32.1 | length 282.2
  Bottom Layer w50: R32.1 6400,7050 D23.2 ; R32.1@6376.81,7023.19 cw(c6441.53,6958.47) 6441.53,7050
NetR1_2: R1.2 R2.1 U1.7 | length 544.8
  Bottom Layer w50: U1.7@4750,7845.47 cw(c4750,7713.83) 4843.08,7806.92 ; U1.7 4800,7850 4900,7750 R1.2 R2.1
NetR4_2: R4.2 R5.1 U3.4 | length 475
  Bottom Layer w75: R4.2 R5.1 U3.4
NetR7_2: R7.2 R11.1 U3.6 | length 475
  Bottom Layer w75: R11.1 R7.2 U3.6
NetR8_2: R8.2 R10.1 | length 145.7
  Bottom Layer w75: R8.2 6825,3675 R10.1
NetR10_2: R10.2 S1.5 | length 170.7
  Bottom Layer w50: R10.2 7225,3575 S1.5
NetR13_2: R13.2 R15.1 U3.8 | length 432.2
  Bottom Layer w50: U3.8 5450,5075 R15.1 R13.2 ; 5408.47,5075 ccw(c5408.47,5166.53) R15.1@5473.19,5101.81
NetR16_2: R16.2 R18.1 U3.10 | length 370.7
  Bottom Layer w50: U3.10 5425,5275 R16.2 R18.1
NetR21_2: R21.2 R23.1 U5.4 | length 300
  Bottom Layer w50: U5.4 R23.1 R21.2
NetR24_2: R24.2 R30.1 U5.8 | length 250
  Bottom Layer w75: R24.2 U5.8
NetR25_2: R25.2 R28.1 U5.6 | length 400
  Bottom Layer w50: U5.6 R28.1 R25.2
NetU1_2: U1.2 U1.6 | length 341.4
  Bottom Layer w50: U1.2 4550,7850 4650,7750 U1.6
NetU2_1: U2.1 U3.2 | length 2426.1
  Bottom Layer w50: 4866.46,5603.78 ccw(c4925,5662.32) U3.2@4925,5579.53 ; U3.2 4895.23,5575 4845.47,5624.76 4845.47,5733.34 4900,5787.87 4900,5875 4995.47,5970.47 5033.34,5970.47 5225.37,6162.5 5437.5,6162.5 5487.5,6212.5 5487.5,6611.24 5613.76,6737.5 6237.5,6737.5 U2.1 ; 6208.89,6737.5 ccw(c6208.89,6791.11) U2.1@6246.8,6753.2
NetU2_5: U2.5 U3.1 | length 1783.9
  Bottom Layer w50: U3.1 5050,5800 5050,5875 5143.93,5875 5143.93,5975 5256.43,6087.5 5468.57,6087.5 5562.5,6181.43 5562.5,6312.5 5600,6350 U2.5
NetU2_11: U2.11 U3.14 | length 3257.4
  Bottom Layer w50: U3.14 5225,5706.07 5418.93,5900 7050,5900 7225,6075 7225,6375 7150,6450 U2.11 ; U3.14@5229.53,5675 cw(c5315.46,5675) 5254.7,5735.76
NetU2_13: U2.13 U3.13 | length 3780.3
  Bottom Layer w50: U3.13 6925,5575 7325,5975 7325,6525 7200,6650 7145.47,6595.47 6648.86,6595.47 6594.33,6650 U2.13 ; U2.13@6550,6645.47 cw(c6550,6527.51) 6633.41,6610.92
NetU4_5: U4.5 U5.2 | length 4655.4
  Bottom Layer w50: U5.2 4850,6593.93 5250,6993.93 5250,7243.93 5570.47,7564.41 5570.47,7732.94 5652.56,7815.03 5652.56,8527.62 5627.56,8552.62 5637.44,8562.5 7111.24,8562.5 7162.5,8511.24 7162.5,8413.76 7136.24,8387.5 6849.97,8387.5 6737.47,8275 U4.5 ; U4.5@6725,8279.53 ccw(c6725,8320.56) 6754.01,8291.55
NetU4_11: U4.11 U5.1 | length 2431.6
  Bottom Layer w50: U5.1 4950,6587.13 5325,6962.13 5325,7100 6400,8175 U4.11 ; 6374.59,8149.59 cw(c6425,8099.19) U4.11@6425,8170.47
NetU4_13: U4.13 U5.14 | length 2514.1
  Bottom Layer w50: U5.14 4950,6250 5075,6375 5075,6606.07 5400,6931.07 5400,7040.75 6334.25,7975 U4.13
RESETIN: P4.1 S1.3 | length 506.1
  Bottom Layer w75: P4.1 6775,5175 S1.3
RESETOUT: P4.2 S1.4 | length 568.2
  Bottom Layer w75: P4.2 6950,5350 S1.4
TEMPVCC5: C23.2 C24.2 P8.2 U5.7 VR7.2 | length 2388.9
  Bottom Layer w75: VR7.2 C23.2 ; P8.2 3325,6825 3450,6700 3450,6425 ; C24.2 C23.2 ; U5.7 3450,6425 ; C23.2 3450,6250 3450,6425
TEMPVCC12: C20.2 C21.2 P8.1 U3.11 VR6.2 | length 6969.6
  Top Layer w50: v1(4075,4675) v1(4075,5525)
  Bottom Layer w50: 2867.47,6978.35 cw(c2814.11,6925) VR6.2@2889.57,6925 ; VR6.2 2900,6945.82 2835.39,7010.43 2808.5,7010.43 2768.93,7050 2575,7050 2575,5525 2625,5475 3825,5475 3875,5525 v1(4075,5525) ; v1(4075,4675) 4648.74,4675 5012.5,5038.76 5012.5,5186.24 5201.26,5375 U3.11 ; 5176.74,5350.48 cw(c5225,5302.22) U3.11@5225,5370.47
  Bottom Layer w75: VR6.2 P8.1 C21.2 C20.2
VCC: 
VCC-5: C9.1 D3.1 P3.2 | length 995.2
  Bottom Layer w75: P3.2 3476.26,7775 3626.26,7925 C9.1 3885.24,7985.24 ; 3853.05,7953.05 ccw(c3756.1,8050) D3.1@3893.21,8050 ; D3.1 3885.24,7985.24 ; D3.1@3891.84,8054.47 cw(c3846.62,8023.85) 3885.24,7985.24
WIFI_VCC5: C17.2 C18.2 P6.1 U3.9 VR5.2 | length 2139.9
  Bottom Layer w50: 5176.74,5150.48 cw(c5225,5102.22) U3.9@5225,5170.47 ; U3.9 5201.26,5175 5137.5,5111.24 5137.5,5057.69 5102.4,5022.6 5175,4950 P6.1 5175,4025 C17.2 C18.2 5550,3875 ; C18.2@5523.62,3899.92 ccw(c5550,3901.42) 5550,3875 ; C18.2@5524.03,3899.03 ccw(c5582.03,3957.03) 5582.03,3875 ; VR5.2 5550,3875
pads on no net: P1.1 U1.5 U5.10 U5.11 U5.13 U6.5 U6.6 U6.8 U6.9 U6.10 U6.11 U6.12 U6.13

## Polygon pours and split planes (outlines as drawn)
GND on Bottom Layer "GndPlane" (solid, pour order 2): 2050,8950 7950,8950 7950,3050 2050,3050

## Keep-outs
Keep-Out Layer:
  lines w10: 2050,3050 2050,8950 7950,8950 7950,3050 2050,3050

## Other copper
Bottom Layer:
  text "Created by Levi and Jen Balling" at 5125,8850 h100
  text "Power Supply Board" at 5125,8700 h100
  text "Version 1" at 5050,8550 h100
  text ".Hole_Count" at 4475,4475 h100
  text "Hole Count" at 5025,4475 h100
  text ".Via_Count" at 4475,4300 h100
  text "Via Count" at 5025,4300 h100
  text ".Print_Date" at 4500,4100 h100
  text "Date Built" at 5050,4100 h100
  text ".Print_Scale" at 4500,3950 h100
  text "Scale" at 5050,3950 h100

## Silkscreen, mask and mechanical layers (free items; w line width, h text height)
Drill Drawing:
  text ".LEGEND" at 8200,3200 h60
  text "Drill Drawing." at 8200,3100 h60

## Dimensions
2050,3050 to 2050,8950 on Mechanical 1
2050,3050 to 7950,3050 on Mechanical 1

## Text inside footprints (layer, text, board x,y; h text height)
S1: Top Overlay "resest" at 8885,5315 h60 r90; Top Overlay "power" at 8865,4175 h60 r90
VR1: Top Overlay "1" at 2940.16,3780.32 h59.06; Top Overlay "2" at 3130.32,3780.32 h59.06; Top Overlay "3" at 3030.32,3780.32 h59.06
VR2: Top Overlay "1" at 2865.16,4805.32 h59.06; Top Overlay "2" at 3055.32,4805.32 h59.06; Top Overlay "3" at 2955.32,4805.31 h59.06
VR3: Top Overlay "1" at 2690.16,7530.32 h59.06; Top Overlay "2" at 2880.32,7530.32 h59.06; Top Overlay "3" at 2780.32,7530.31 h59.06
VR4: Top Overlay "1" at 2690.16,8405.32 h59.06; Top Overlay "2" at 2880.32,8405.32 h59.06; Top Overlay "3" at 2780.32,8405.32 h59.06
VR5: Top Overlay "1" at 6059.84,4019.68 h59.06 r180; Top Overlay "2" at 5869.69,4019.68 h59.06 r180; Top Overlay "3" at 5969.69,4019.69 h59.06 r180
VR6: Top Overlay "1" at 2690.16,6780.32 h59.06; Top Overlay "2" at 2880.32,6780.32 h59.06; Top Overlay "3" at 2780.32,6780.31 h59.06
VR7: Top Overlay "1" at 2740.16,5955.32 h59.06; Top Overlay "2" at 2930.32,5955.32 h59.06; Top Overlay "3" at 2830.32,5955.31 h59.06